# EAGLE board motor_driver_adapter (EAGLE 9.1.0)
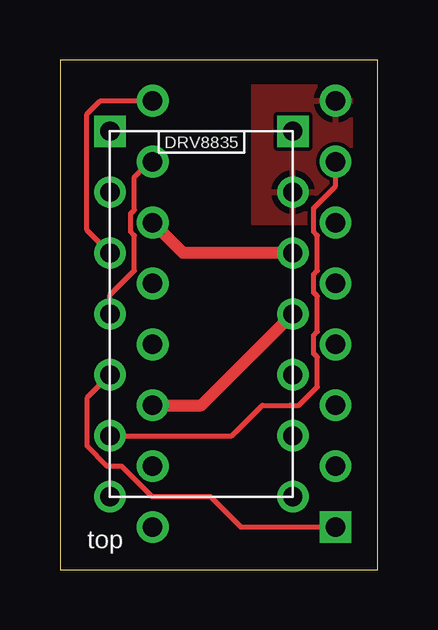
[diagram p0: board, top side]
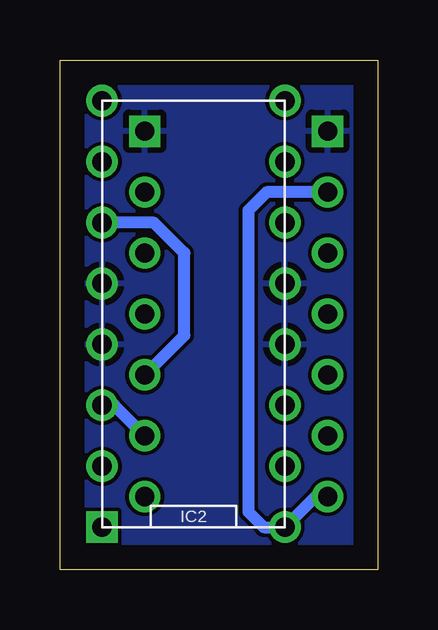
[diagram p1: board, bottom side, seen from below]

Size 13.23 x 21.26 mm. Coordinates in mm from the lower left corner, seen from the top.
Outline: 0,0 13.23,0 13.23,21.26 0,21.26 0,0
Copper layers (1*16): Top 0.035mm / dielectric 1.5mm / Bottom 0.035mm
Design rules "SeeedStudio_2layer_DRU": minimum track width 6mil, minimum drill 0.35mm, track to track 6mil, track to pad 6mil, pad to pad 6mil, via to via 6mil, smd to smd 6mil, copper to edge 40mil, drill to drill 6mil, minimum pad ring 10mil, minimum via ring 8mil, stop-mask expansion 4mil, vias tented up to drill 0mil, thermal gap 10mil

## Footprints (pad centres in the part's own frame; a part is rotated, then mirrored left to right if it is on the bottom)
DIL16 = drill 0.813 square: 1 -8.89,-3.81 | drill 0.813: 2 -6.35,-3.81; 3 -3.81,-3.81; 4 -1.27,-3.81; 5 1.27,-3.81; 6 3.81,-3.81; 7 6.35,-3.81; 8 8.89,-3.81; 9 8.89,3.81; 10 6.35,3.81; 11 3.81,3.81; 12 1.27,3.81; 13 -1.27,3.81; 14 -3.81,3.81; 15 -6.35,3.81; 16 -8.89,3.81
POLOLU_MOTOR_DRV_DRV8835 = drill 0.8: AENBL 1.27,6.35; AOUT1 8.89,3.81; AOUT2 8.89,6.35; APHASE 1.27,3.81; BENBL 1.27,11.43; BOUT1 8.89,8.89; BOUT2 8.89,11.43; BPHASE 1.27,8.89; MODE 1.27,1.27; VCC 1.27,13.97; VIN 8.89,13.97; VMM 8.89,1.27 | drill 0.8 square: LGND 1.27,16.51; MGND 8.89,16.51

## Placement (x,y rotation side)
IC1  L293D  [DIL16]  7.67,10.67 90 top
IC2  DRV8835  [POLOLU_MOTOR_DRV_DRV8835]  0.81,1.78 0 top

## Library data of the parts
IC1 = st-microelectronics; MPN: L293D; OC_FARNELL: 9589619; OC_NEWARK: 56P8249
IC2 = pololu

## Nets
+6V: IC1.8 IC2.VIN
GND: IC1.4 IC1.5 IC1.12 IC1.13 IC2.LGND IC2.MGND
MOT_L_1: IC1.3 IC2.AOUT1
MOT_L_2: IC1.6 IC2.AOUT2
MOT_L_DIR: IC1.7 IC2.APHASE
MOT_L_PWM: IC1.1 IC2.AENBL
MOT_R_1: IC1.14 IC2.BOUT1
MOT_R_2: IC1.11 IC2.BOUT2
MOT_R_DIR: IC1.10 IC2.BPHASE
MOT_R_PWM: IC1.9 IC2.BENBL
VCC: IC1.16 IC2.MODE IC2.VCC

## Tracks (layer width: path | path; a pad name or v marks a point on that pad's centre or on a via)
+6V
  pour Top: 12.62,20.95 8.05,20.95 8.05,14.48 12.62,14.48
GND
  pour Bottom: 0.69,20.95 0.69,0.51 12.62,0.51 12.62,20.95
MOT_L_1
  Bottom 0.508: IC2.AOUT1 10.97,6.86 IC1.3
MOT_L_2
  Bottom 0.508: IC2.AOUT2 8.05,9.78 8.05,13.21 9.32,14.48 IC1.6
MOT_L_DIR
  Top 0.203: IC2.APHASE 7.16,5.59 8.43,6.86 9.58,6.86 9.7,6.86 9.96,6.86 10.72,7.62 10.72,8.87 10.57,9.02 10.57,9.78 10.72,9.93 10.72,11.41 10.57,11.56 10.57,12.32 10.72,12.47 10.72,13.95 10.57,14.1 10.57,15.09 11.48,16 IC1.7
MOT_L_PWM
  Top 0.203: IC1.1 7.54,1.78 6.27,3.05 3.84,3.05 2.57,4.32 1.96,4.32 1.12,5.16 1.12,7.16 IC2.AENBL
MOT_R_1
  Top 0.508: IC1.14 5.89,6.86 IC2.BOUT1
MOT_R_2
  Top 0.508: IC2.BOUT2 5.13,13.21 IC1.11
MOT_R_DIR
  Top 0.203: IC2.BPHASE 2.08,11.45 3.1,12.47 3.1,13.95 2.95,14.1 2.95,14.86 3.1,15.01 3.1,16.38 3.73,17.02 IC1.10
MOT_R_PWM
  Top 0.203: IC1.9 1.69,19.56 1.12,18.99 1.12,14.17 IC2.BENBL
VCC
  Bottom 0.508: IC2.VCC 4.62,15.75 5.38,14.99 5.38,2.41 4.75,1.78 IC1.16 2.59,3.05 IC2.MODE

## Text on the board
tNames: DRV8835 | top
bNames: IC2